# Altium PCB as5047u.PcbDoc
Units mm, origin at the board's own origin, x right, y up, seen from the top; angles counter-clockwise.
Board outline 17 x 25 mm, 2 copper layers (Top Layer, Bottom Layer); 4 components, 6 nets, 30 pads, 1 vias.
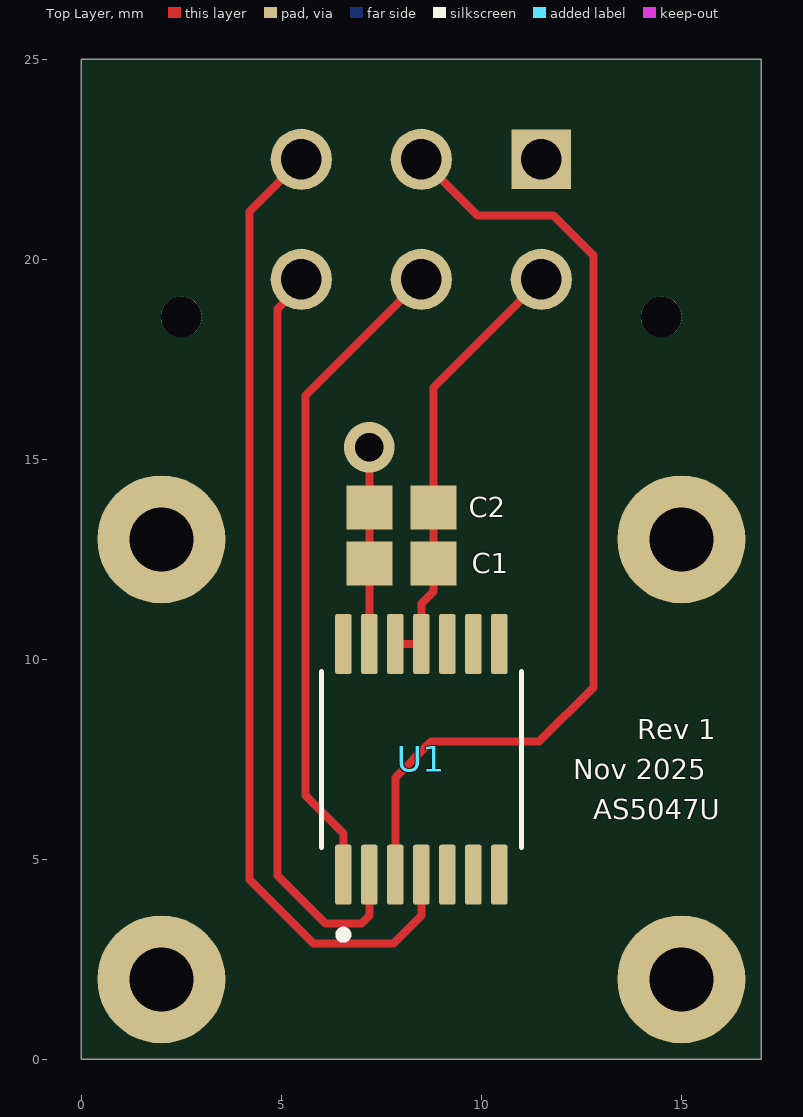
[diagram p0: Top Layer view]
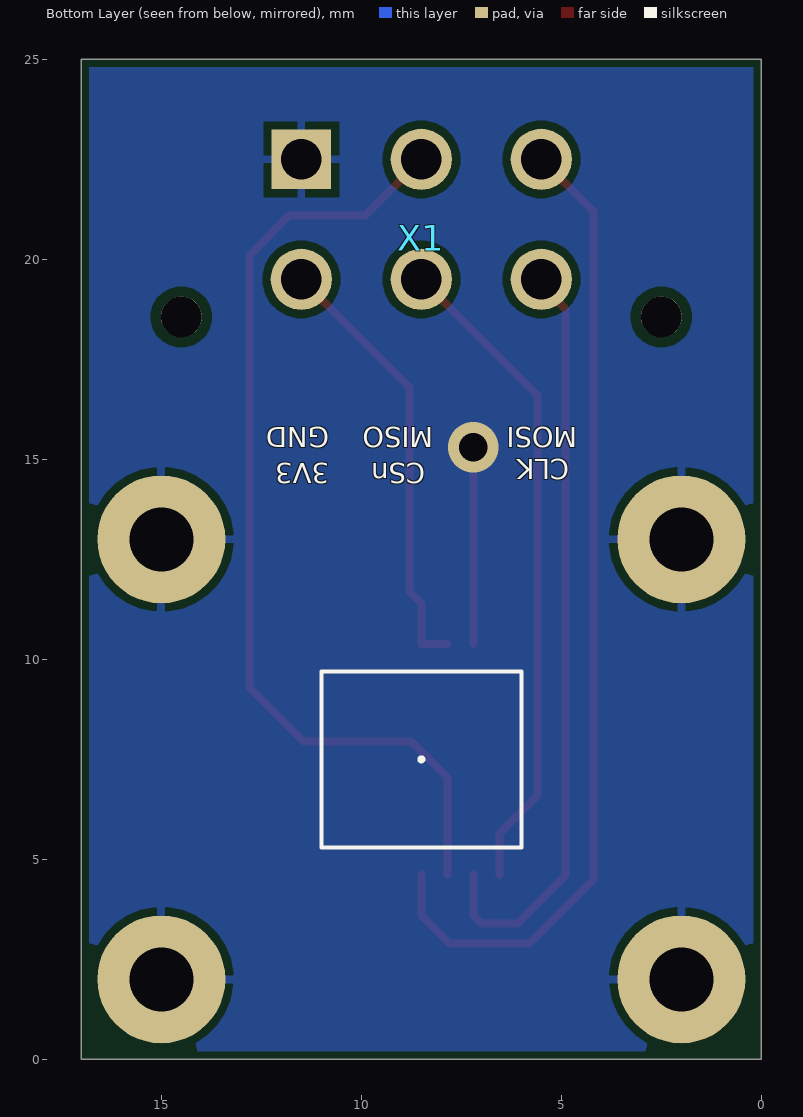
[diagram p1: Bottom Layer view, seen from below]

## Layer stack, top to bottom
Top Solder: solder mask 0.0102, Solder Resist, Dk 3.5
Top Layer: signal copper 0.0356
Dielectric 1: dielectric 0.32, FR-4, Dk 4.8
Bottom Layer: signal copper 0.0356
Bottom Solder: solder mask 0.0102, Solder Resist, Dk 3.5

## Board outline
0,0 17,0 17,25 0,25

## Design rules (kind name [scope] priority, off if disabled: settings)
BoardOutlineClearance [All] p1: gap=0.2 ignorepadtopadclearanceinfootprint=FALSE
Clearance [All] p1: gap=0.203 ignorepadtopadclearanceinfootprint=FALSE except(0.25: Arc-Hole Track-Hole SMDPad-Hole THPad-Hole Via-Hole Fill-Hole Poly-Hole Region-Hole Text-Hole)
ComponentClearance [All] p1: gap=0.127 collisioncheckmode=3 verticalgap=0.127 showdistances=TRUE
DiffPairsRouting [All] p1: maxlimit=0.381 minlimit=0.203 mostfreqgap=0.203 toplayer_minwidth=0.203 toplayer_maxwidth=25.4 toplayer_prefwidth=0.203 bottomlayer_minwidth=0.203 bottomlayer_maxwidth=25.4 bottomlayer_prefwidth=0.203 maxuncoupledlength=12.7
Height [All] p1: minheight=0 maxheight=1816.048 prefheight=12.7
HoleSize [All] p1: absolutevalues=TRUE maxlimit=6.3 minlimit=0.3 maxpercent=80.000 minpercent=20.000
HoleToHoleClearance [All] p1: gap=0.25 allowstackedmicrovias=FALSE
MinimumAnnularRing [All] p1: minimumring=0.076
MinimumSolderMaskSliver [All] p1: minsoldermaskwidth=0
PlaneClearance [All] p1: clearance=0.203
PlaneConnect PlaneConnectPowerPads [InPadClass('PowerPads')] p1: planeconnectstyle=Direct reliefexpansion=0.508 reliefentries=4 reliefconductorwidth=0.254 reliefairgap=0.254
PlaneConnect [All] p2: pad.planeconnectstyle=Relief pad.reliefexpansion=0.3 pad.reliefentries=4 pad.reliefconductorwidth=0.203 pad.reliefairgap=0.203 via.planeconnectstyle=Direct via.reliefexpansion=0.3 via.reliefentries=4 via.reliefconductorwidth=0.127 via.reliefairgap=0.127
PolygonConnect PolygonConnectPowerPads [All vs (InPadClass('PowerPads'))] p1: connectstyle=Direct reliefconductorwidth=0.254 reliefentries=4 polygonreliefangle="90 Angle" airgapwidth=0.254
PolygonConnect [All] p2: thpad.connectstyle=Relief thpad.reliefconductorwidth=0.203 thpad.reliefentries=4 thpad.polygonreliefangle="90 Angle" thpad.airgapwidth=0.203 smdpad.connectstyle=Relief smdpad.reliefconductorwidth=0.203 smdpad.reliefentries=4 smdpad.polygonreliefangle="90 Angle" smdpad.airgapwidth=0.203 via.connectstyle=Direct via.reliefconductorwidth=0.127 via.reliefentries=4 via.polygonreliefangle="90 Angle" via.airgapwidth=0.127
RoutingVias [All] p1: holewidth=0.3 width=0.6 viastyle="Through Hole" minholewidth=0.3 minwidth=0.6 maxholewidth=0.6 maxwidth=6.6
SilkToSilkClearance [All] p1: silktosilkclearance=0
SilkToSolderMaskClearance [IsPad] p1: minsilkscreentomaskgap=0.127 clearancetoexposedcopper=TRUE
SolderMaskExpansion [All] p1: expansion=0.075 istentingtop=FALSE
SupplyNets "Schematic Supply Nets_1" [InNet('GND')] p1: voltage=0.000
SupplyNets "Schematic Supply Nets" [InNet('3V3')] p2: voltage=0.000
Width [All] p1: maxlimit=25.4 minlimit=0.203 preferedwidth=0.203 minimp=50.000000 maximp=50.000000 favimp=50.000000
20 further rules are at their usual default settings.

## Components (designator, comment, footprint, x,y, rotation, side; value= is the part's Value field where it differs from the comment)
C1 "CC0603KRX7R0BB104" CAP-0603 8,12.4 r0 top
C2 "CC0603KRX7R7BB105" CAP-0603 8,13.8 r0 top
U1 "AS5047U-HTSM" SOP65P640X110-14N 8.5,7.5 r90 top
X1 "Molex 43045-0612" 43045-0612 8.5,22.5 r0 bottom

## Footprints (in the part's own frame and the unit in brackets; to place one, negate y for a bottom-side part, rotate by r counter-clockwise, add the part's x,y. Pads: shape width x height; smd on the part's side, far side on the other; paste and mask are expansions set on the pad)
43045-0612 [mm]
  round 1.02 hole 1.02 unplated: 1(-6,3.94) 1(6,3.94)
  rect 1.482x1.482 / inner rect 1.524x1.524 / far side rect 1.482x1.482 hole 1.02: P$1(3,0)
  round 1.53 / inner round 1.524 / far side round 1.53 hole 1.02: P$2(0,0) P$3(-3,0) P$4(3,3) P$5(0,3) P$6(-3,3)
  body extent -6.58,-2.45 6.58,6.32, height 10.03
CAP-0603 [mm]
  rect 1.15x1.1 smd: 1(-0.8,0) 2(0.8,0)
  body extent -0.8,-0.45 0.8,0.45, height 0.8
SOP65P640X110-14N [mm]
  rrect25% 1.5x0.41 smd paste+0 mask+0.102: 1(-2.885,1.95) 2(-2.885,1.3) 3(-2.885,0.65) 4(-2.885,0) 5(-2.885,-0.65) 6(-2.885,-1.3) 7(-2.885,-1.95) 8(2.885,-1.95) 9(2.885,-1.3) 10(2.885,-0.65) 11(2.885,0) 12(2.885,0.65) 13(2.885,1.3) 14(2.885,1.95)
  silkscreen extent -4.48,-2.5 2.2,2.5

## Part data
C1: library part CAP-100N-0001, "CAP CER 0.1UF 100V X7R 0603", Capacitance="100 nF", Voltage="100 V", ComponentLink1Description=Datasheet, ComponentLink1URL=https://www.yageo.com/upload/media/product/app/datasheet/mlcc/upy-np0x7r_mv_100-to-630v.pdf, Device Class=Ceramic, Size=0603
C2: library part CAP-1U-0002, "CAP CER 1UF 16V X7R 0603", Capacitance="1.0 uF", Voltage=16V, Device Class=Ceramic, Size=0603
U1: library part IC-ABSENC-0001, "Hall Effect Sensor Rotary Position External Magnet, Not Included Gull Wing", Package="TSSOP-14 ams", Check_prices=https://www.snapeda.com/parts/AS5047D-ATSM/ams/view-part/?ref=eda, ComponentLink1Description=Datasheet, ComponentLink1URL=https://www.mouser.com/datasheet/3/5912/1/AS5047U_DS000637_1_01.pdf, MF=ams, MP=AS5047D-ATSM, SnapEDA_Link=https://www.snapeda.com/parts/AS5047D-ATSM/ams/view-part/?ref=snap
X1: library part "Micro-Fit Molex 6 Pin 2 Row Vertical", Package=43045-0612, DeviceName=43045-0612, DeviceSetName=HEADER_POS6_?, GateName_1=G$1, LibraryName=con-molex-micro-fit-3_0_2, SymbolName_1=HEADER_POS6

## Free pads (board coordinates)
  round 3.2 hole 1.6: 3(2,2) 3(2,13) 3(15,2) 3(15,13)

## Via types
v1: diameter 1.27, hole 0.711, Top Layer to Bottom Layer, 1 vias

## Nets (pads, with @x,y where several pads share a name; then routed paths per layer and width w, separated by ;. In a path a pad name is that pad's centre, name@x,y a point inside that pad or via, vN(x,y) a via of type N, cw(c..) or ccw(c..) an arc to the next point about the centre after c; other vN are vias at no path point)
3V3: C1.2 C2.2 U1.11 U1.12 X1.P$4 | length 11
  Top Layer w0.203: U1.12 U1.11 8.5,11.4 8.8,11.7 C1.2 C2.2 8.8,16.8 X1.P$4
CLK: U1.2 X1.P$6 | length 19
  Top Layer w0.203: X1.P$6 5.5,19.355 4.9,18.755 4.9,4.6 6.1,3.4 7,3.4 7.2,3.6 U1.2
CSn: U1.1 X1.P$5 | length 16.5
  Top Layer w0.203: U1.1 6.55,5.65 5.6,6.6 5.6,16.6 X1.P$5
GND: C1.1 C2.1 pad.3 U1.13 X1.P$1 | length 4.9
  Top Layer w0.203: U1.13 C1.1 C2.1 v1(7.2,15.3)
MISO: U1.3 X1.P$2 | length 24.4
  Top Layer w0.203: U1.3 7.85,7.05 8.746,7.946 11.446,7.946 12.8,9.3 12.8,20.1 11.805,21.095 9.905,21.095 X1.P$2
MOSI: U1.4 X1.P$3 | length 24.8
  Top Layer w0.203: X1.P$3 4.2,21.2 4.2,4.5 5.8,2.9 7.8,2.9 8.5,3.6 U1.4
pads on no net: U1.5 U1.6 U1.7 U1.8 U1.9 U1.10 U1.14 X1.1

## Polygon pours and split planes (outlines as drawn)
GND on Bottom Layer "GND_L02_P001" (solid, pour order 1): 0,25 17,25 17,0 0,0

## Silkscreen, mask and mechanical layers (free items; w line width, h text height)
Top Overlay:
  text "Rev 1" at 13.9,8 h0.5
  text "Nov 2025" at 12.3,7 h0.5
  text "AS5047U" at 12.8,6 h0.5
Bottom Overlay:
  circle w0.1: c8.5,7.5 r0.05
  lines w0.1: 6,5.3 11,5.3 11,9.7 6,9.7 6,5.3
  text "MOSI" at 4.6,15.8 h0.5 r180
  text "MISO" at 8.2,15.8 h0.5 r180
  text "GND" at 10.8,15.8 h0.5 r180
  text "CLK" at 4.8,15 h0.5 r180
  text "CSn" at 8.4,14.9 h0.5 r180
  text "3V3" at 10.8,14.9 h0.5 r180

## Dimensions
2,2 to 15,2 on Mechanical 1
2,2 to 2,13 on Mechanical 1
0,0 to 17,0 on Mechanical 1